# Altium PCB PCB1.PcbDoc
Units mm, origin at the board's own origin, x right, y up, seen from the top; angles counter-clockwise.
Board outline 55 x 65 mm, 2 copper layers (Top Layer, Bottom Layer); 1 components, 48 nets, 96 pads, 4 vias.
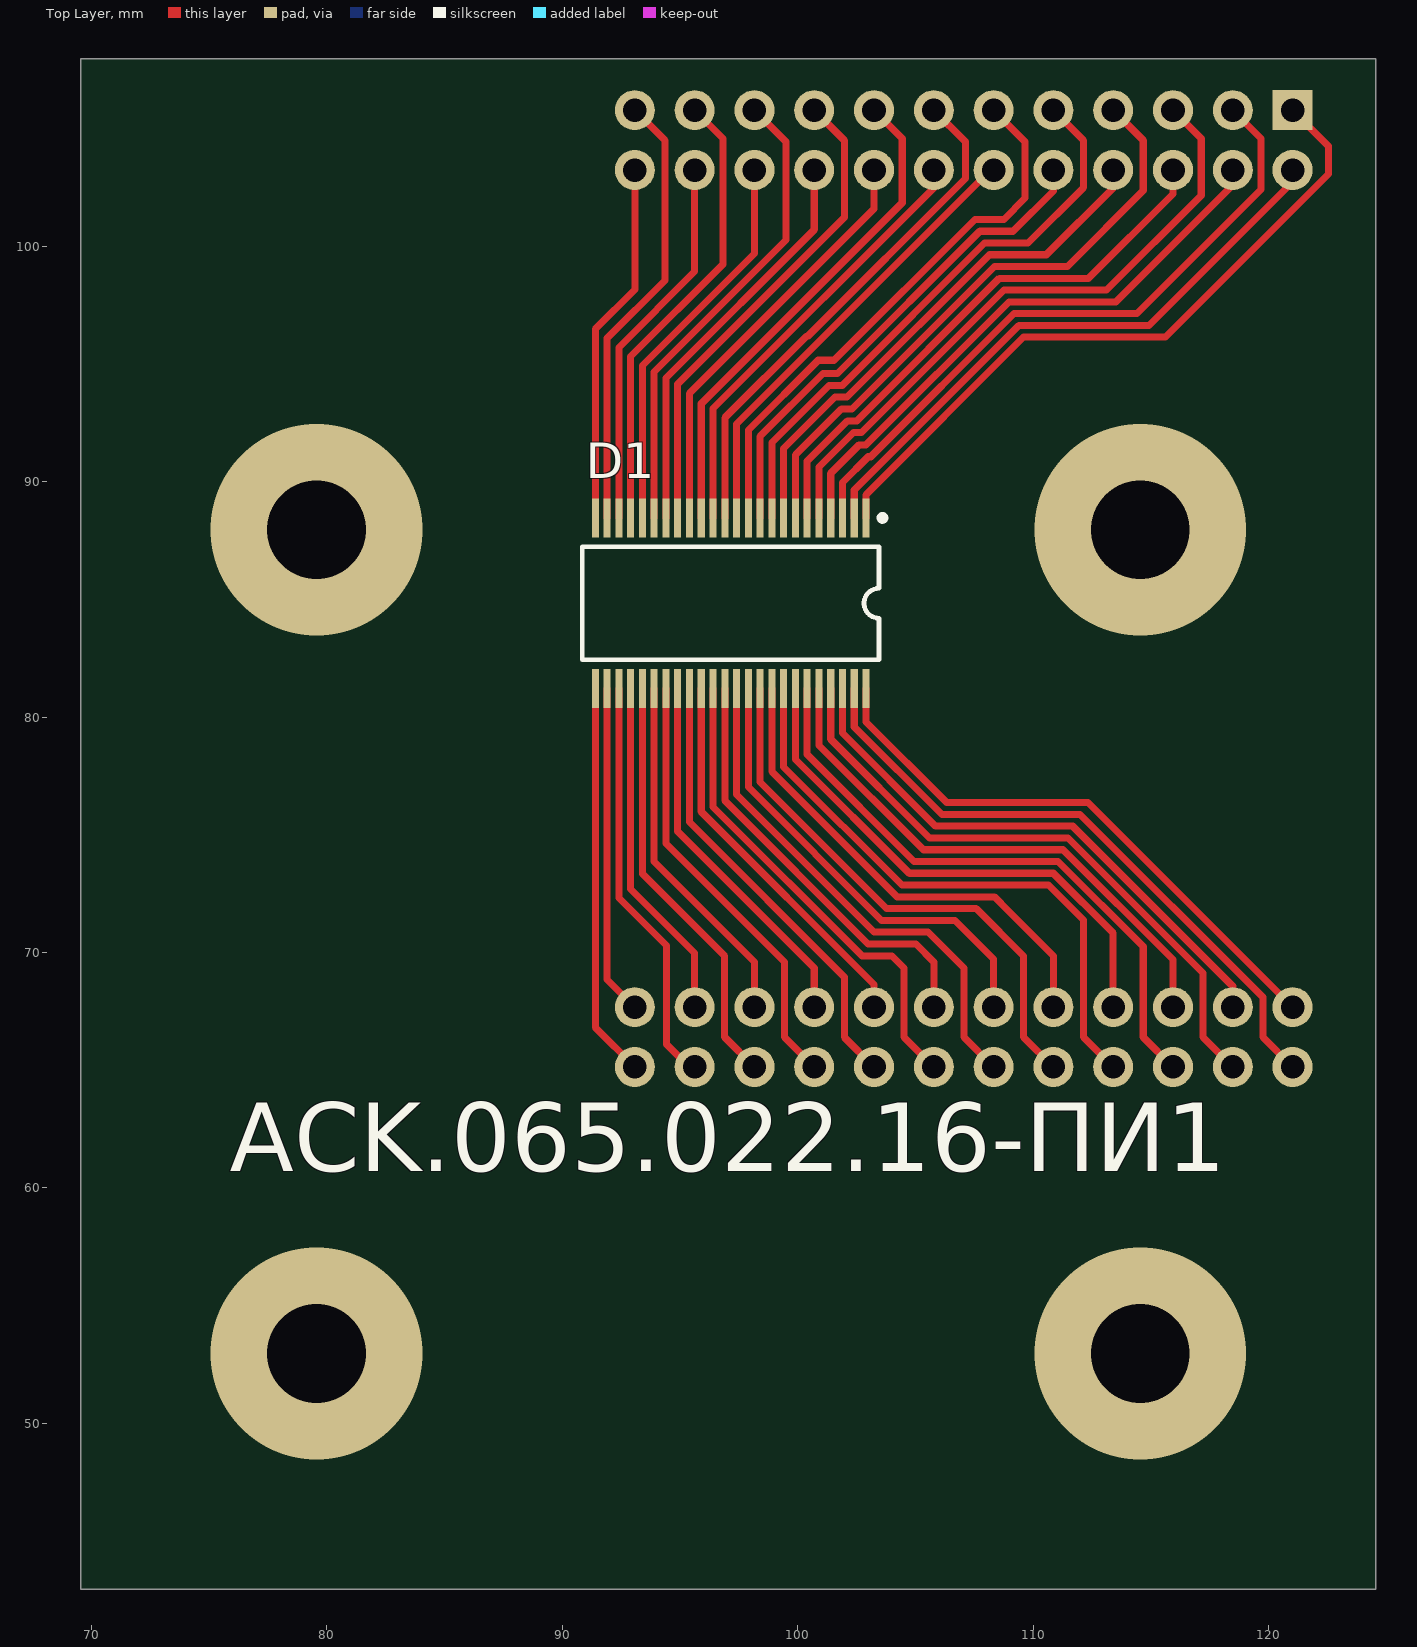
[diagram p0: Top Layer view]
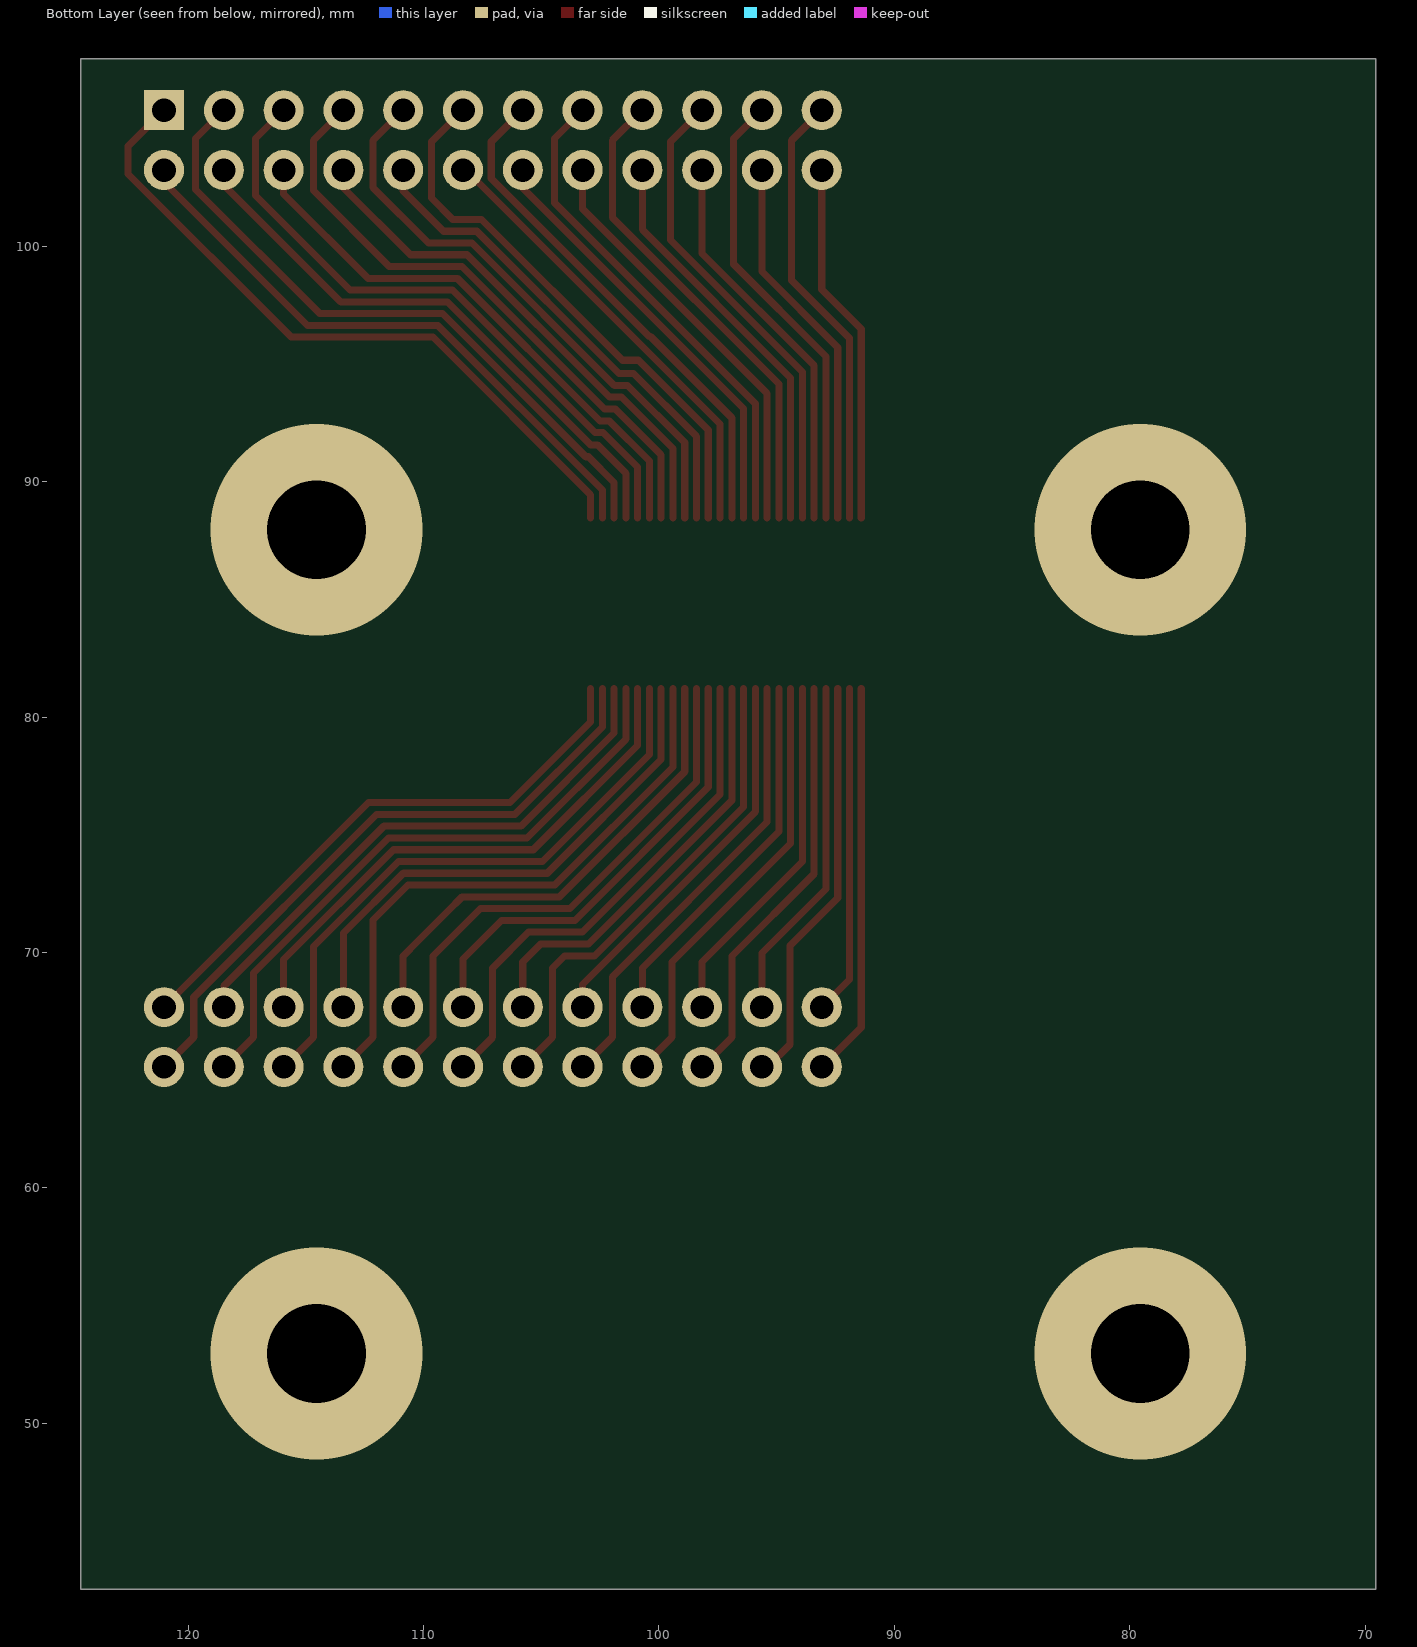
[diagram p1: Bottom Layer view, seen from below]

## Layer stack, top to bottom
Top Solder: solder mask 0.0102, Solder Resist, Dk 3.5
Top Layer: signal copper 0.0356
Dielectric 1: dielectric 0.32, FR-4, Dk 4.8
Bottom Layer: signal copper 0.0356
Bottom Solder: solder mask 0.0102, Solder Resist, Dk 3.5

## Board outline
69.554,42.959 69.554,107.959 124.554,107.959 124.554,42.959

## Design rules (kind name [scope] priority, off if disabled: settings)
Clearance [All] p1: gap=0.2
PolygonConnect [All] p1: connectstyle=Relief reliefconductorwidth=0.254 reliefentries=4 polygonreliefangle="90 Angle" airgapwidth=0.254
RoutingVias [All] p1: holewidth=0.711 width=1.27 viastyle="Through Hole" minholewidth=0.711 minwidth=1.27 maxholewidth=0.711 maxwidth=1.27
SolderMaskExpansion [All] p1: expansion=0.102
Width [All] p1: maxlimit=0.3 minlimit=0.3 preferedwidth=0.3
30 further rules are at their usual default settings.

## Components (designator, comment, footprint, x,y, rotation, side; value= is the part's Value field where it differs from the comment)
D1 "Comment" DGG048 97.155,84.836 r180 top

## Footprints (in the part's own frame and the unit in brackets; to place one, negate y for a bottom-side part, rotate by r counter-clockwise, add the part's x,y. Pads: shape width x height; smd on the part's side, far side on the other; paste and mask are expansions set on the pad)
DGG048 [mm] "Shrink Small Outline; 48 Leads; Body Width 6.1 mm; Pitch 0.5 mm"
  rect 0.3x1.65 smd: 1(-5.75,-3.625) 2(-5.25,-3.625) 3(-4.75,-3.625) 4(-4.25,-3.625) 5(-3.75,-3.625) 6(-3.25,-3.625) 7(-2.75,-3.625) 8(-2.25,-3.625) 9(-1.75,-3.625) 10(-1.25,-3.625) 11(-0.75,-3.625) 12(-0.25,-3.625) 13(0.25,-3.625) 14(0.75,-3.625) 15(1.25,-3.625) 16(1.75,-3.625) 17(2.25,-3.625) 18(2.75,-3.625) 19(3.25,-3.625) 20(3.75,-3.625) 21(4.25,-3.625) 22(4.75,-3.625) 23(5.25,-3.625) 24(5.75,-3.625) 25(5.75,3.625) 26(5.25,3.625) 27(4.75,3.625) 28(4.25,3.625) 29(3.75,3.625) 30(3.25,3.625) 31(2.75,3.625) 32(2.25,3.625) 33(1.75,3.625) 34(1.25,3.625) 35(0.75,3.625) 36(0.25,3.625) 37(-0.25,3.625) 38(-0.75,3.625) 39(-1.25,3.625) 40(-1.75,3.625) 41(-2.25,3.625) 42(-2.75,3.625) 43(-3.25,3.625) 44(-3.75,3.625) 45(-4.25,3.625) 46(-4.75,3.625) 47(-5.25,3.625) 48(-5.75,3.625)
  silkscreen extent -6.58,-3.75 6.3,2.4

## Free pads (board coordinates)
  rect 1.7x1.7 hole 1: 1(121.024,105.779)
  round 1.7 hole 1: 2(121.024,103.239) 3(118.484,105.779) 4(118.484,103.239) 5(115.944,105.779) 6(115.944,103.239) 7(113.404,105.779) 8(113.404,103.239) 9(110.864,105.779) 10(110.864,103.239) 11(108.324,105.779) 12(108.324,103.239) 13(105.784,105.779) 14(105.784,103.239) 15(103.244,105.779) 16(103.244,103.239) 17(100.704,105.779) 18(100.704,103.239) 19(98.164,105.779) 20(98.164,103.239) 21(95.624,105.779) 22(95.624,103.239) 23(93.084,105.779) 24(93.084,103.239) 25(93.084,65.139) 26(93.084,67.679) 27(95.624,65.139) 28(95.624,67.679) 29(98.164,65.139) 30(98.164,67.679) 31(100.704,65.139) 32(100.704,67.679) 33(103.244,65.139) 34(103.244,67.679) 35(105.784,65.139) 36(105.784,67.679) 37(108.324,65.139) 38(108.324,67.679) 39(110.864,65.139) 40(110.864,67.679) 41(113.404,65.139) 42(113.404,67.679) 43(115.944,65.139) 44(115.944,67.679) 45(118.484,65.139) 46(118.484,67.679) 47(121.024,65.139) 48(121.024,67.679)

## Via types
v1: diameter 9, hole 4.2, Top Layer to Bottom Layer, 4 vias

## Nets (pads, with @x,y where several pads share a name; then routed paths per layer and width w, separated by ;. In a path a pad name is that pad's centre, name@x,y a point inside that pad or via, vN(x,y) a via of type N, cw(c..) or ccw(c..) an arc to the next point about the centre after c; other vN are vias at no path point)
1: D1.1 pad.1 | length 29.6
  Top Layer w0.3: D1.1 102.905,89.443 109.601,96.139 115.621,96.139 122.555,103.073 122.555,104.248 pad.1
2: D1.2 pad.2 | length 25.7
  Top Layer w0.3: D1.2 102.405,89.236 102.405,89.65 109.394,96.639 114.927,96.639 121.024,102.736 pad.2
3: D1.3 pad.3 | length 28.3
  Top Layer w0.3: D1.3 101.905,89.967 102.997,91.059 103.107,91.059 109.187,97.139 114.411,97.139 119.684,102.412 119.684,104.579 pad.3
4: D1.4 pad.4 | length 24.7
  Top Layer w0.3: D1.4 101.405,90.356 102.616,91.567 102.908,91.567 108.98,97.639 113.514,97.639 118.484,102.609 pad.4
5: D1.5 pad.5 | length 27.3
  Top Layer w0.3: D1.5 100.905,90.618 102.371,92.084 102.717,92.084 108.773,98.139 113.125,98.139 117.144,102.158 117.144,104.579 pad.5
6: D1.6 pad.6 | length 23.7
  Top Layer w0.3: D1.6 100.405,90.88 102.109,92.584 102.51,92.584 108.565,98.639 112.355,98.639 115.944,102.228 pad.6
7: D1.7 pad.7 | length 26.1
  Top Layer w0.3: D1.7 99.905,91.142 101.854,93.091 102.31,93.091 108.358,99.139 111.458,99.139 114.681,102.362 114.681,104.502 pad.7
8: D1.8 pad.8 | length 22.3
  Top Layer w0.3: D1.8 99.405,91.404 101.592,93.591 102.103,93.591 108.151,99.639 110.561,99.639 113.404,102.482 pad.8
9: D1.9 pad.9 | length 24.7
  Top Layer w0.3: D1.9 98.905,91.666 101.33,94.091 101.896,94.091 107.944,100.139 109.791,100.139 112.141,102.489 112.141,104.502 pad.9
10: D1.10 pad.10 | length 21.1
  Top Layer w0.3: D1.10 98.405,91.928 101.073,94.596 101.694,94.596 107.737,100.639 109.148,100.639 110.864,102.355 pad.10
11: D1.11 pad.11 | length 23.9
  Top Layer w0.3: D1.11 97.905,92.19 100.874,95.159 101.55,95.159 107.53,101.139 108.759,101.139 109.664,102.044 109.664,104.439 pad.11
12: D1.12 pad.12 | length 19.4
  Top Layer w0.3: D1.12 97.405,92.452 108.192,103.239 pad.12
13: D1.13 pad.13 | length 22.1
  Top Layer w0.3: D1.13 96.905,92.714 100.35,96.159 100.405,96.159 107.124,102.878 107.124,104.439 pad.13
14: D1.14 pad.14 | length 18.7
  Top Layer w0.3: D1.14 96.405,93.103 105.784,102.482 pad.14
15: D1.15 pad.15 | length 21.4
  Top Layer w0.3: D1.15 95.905,93.31 104.444,101.849 104.444,104.579 pad.15
16: D1.16 pad.16 | length 18
  Top Layer w0.3: D1.16 95.405,93.754 103.244,101.593 pad.16
17: D1.17 pad.17 | length 20.8
  Top Layer w0.3: D1.17 94.905,94.143 101.981,101.219 101.981,104.502 pad.17
18: D1.18 pad.18 | length 17.4
  Top Layer w0.3: D1.18 94.405,94.405 100.704,100.704 pad.18
19: D1.19 pad.19 | length 20.2
  Top Layer w0.3: D1.19 93.905,94.667 99.504,100.266 99.504,104.439 pad.19
20: D1.20 pad.20 | length 16.7
  Top Layer w0.3: D1.20 93.405,94.929 98.164,99.688 pad.20
21: D1.21 pad.21 | length 19.4
  Top Layer w0.3: D1.21 92.905,95.318 96.824,99.237 96.824,104.579 pad.21
22: D1.22 pad.22 | length 16.1
  Top Layer w0.3: D1.22 92.405,95.707 95.624,98.926 pad.22
23: D1.23 pad.23 | length 19
  Top Layer w0.3: D1.23 91.905,96.096 94.361,98.552 94.361,104.502 pad.23 pad.23@92.976,105.779
24: D1.24 pad.24 | length 15.5
  Top Layer w0.3: D1.24 91.405,96.485 93.084,98.164 pad.24
25: D1.25 pad.25 | length 16.8
  Top Layer w0.3: D1.25 91.405,66.818 pad.25
26: D1.26 pad.26 | length 14
  Top Layer w0.3: D1.26 91.905,68.858 pad.26
27: D1.27 pad.27 | length 17.5
  Top Layer w0.3: D1.27 92.405,72.314 94.424,70.295 94.424,66.104 95.389,65.139 pad.27
28: D1.28 pad.28 | length 14.7
  Top Layer w0.3: D1.28 92.905,72.703 95.624,69.984 pad.28
29: D1.29 pad.29 | length 18
  Top Layer w0.3: D1.29 93.405,73.346 96.901,69.85 96.901,66.402 pad.29
30: D1.30 pad.30 | length 15.3
  Top Layer w0.3: D1.30 93.905,73.862 98.164,69.603 pad.30
31: D1.31 pad.31 | length 18.7
  Top Layer w0.3: D1.31 94.405,74.632 99.441,69.596 99.441,66.402 pad.31
32: D1.32 pad.32 | length 15.9
  Top Layer w0.3: D1.32 94.905,75.148 100.704,69.349 pad.32
33: D1.33 pad.33 | length 19.3
  Top Layer w0.3: D1.33 95.405,75.537 101.981,68.961 101.981,66.402 pad.33
34: D1.34 pad.34 | length 16.6
  Top Layer w0.3: D1.34 95.905,75.981 103.244,68.642 pad.34
35: D1.35 pad.35 | length 20.7
  Top Layer w0.3: D1.35 96.405,76.188 102.743,69.85 104.013,69.85 104.521,69.342 104.521,66.402 pad.35
36: D1.36 pad.36 | length 18.4
  Top Layer w0.3: D1.36 96.905,76.45 102.989,70.366 105.021,70.366 105.784,69.603 pad.36
37: D1.37 pad.37 | length 21.9
  Top Layer w0.3: D1.37 97.405,76.712 103.251,70.866 105.537,70.866 107.061,69.342 107.061,66.402 pad.37
38: D1.38 pad.38 | length 19.7
  Top Layer w0.3: D1.38 97.905,77.029 103.568,71.366 106.688,71.366 108.324,69.73 pad.38
39: D1.39 pad.39 | length 23.5
  Top Layer w0.3: D1.39 98.405,77.236 103.775,71.866 107.585,71.866 109.601,69.85 109.601,66.402 pad.39
40: D1.40 pad.40 | length 20.9
  Top Layer w0.3: D1.40 98.905,77.68 104.219,72.366 108.355,72.366 108.982,71.739 110.237,70.484 110.864,69.857 pad.40
41: D1.41 pad.41 | length 25.5
  Top Layer w0.3: D1.41 99.405,77.887 104.426,72.866 110.652,72.866 112.141,71.377 112.141,66.402 pad.41
42: D1.42 pad.42 | length 22.7
  Top Layer w0.3: D1.42 99.905,78.204 104.743,73.366 110.859,73.366 113.404,70.821 pad.42
43: D1.43 pad.43 | length 26.1
  Top Layer w0.3: D1.43 100.405,78.411 104.95,73.866 111.066,73.866 114.681,70.251 114.681,66.402 pad.43
44: D1.44 pad.44 | length 23.2
  Top Layer w0.3: D1.44 100.905,78.8 105.339,74.366 111.274,74.366 115.944,69.696 pad.44
45: D1.45 pad.45 | length 26.6
  Top Layer w0.3: D1.45 101.405,79.062 105.601,74.866 111.481,74.866 117.221,69.126 117.221,66.402 pad.45
46: D1.46 pad.46 | length 23.8
  Top Layer w0.3: D1.46 101.905,79.324 105.863,75.366 111.688,75.366 118.484,68.57 pad.46
47: D1.47 pad.47 | length 27.2
  Top Layer w0.3: D1.47 102.405,79.586 106.125,75.866 111.994,75.866 119.761,68.099 119.761,66.402 pad.47
48: D1.48 pad.48 | length 24.6
  Top Layer w0.3: D1.48 102.905,79.793 106.332,76.366 112.337,76.366 pad.48
copper on no net:
  other v1: 79.554,52.959 114.554,52.959 79.554,87.959 114.554,87.959

## Silkscreen, mask and mechanical layers (free items; w line width, h text height)
Top Overlay:
  text "ACK.065.022.16-ПИ1" at 75.882,59.744 h5
Mechanical 1:
  the board outline again, w0.254